# Altium PCB pin.PcbDoc
Units mm, origin at the board's own origin, x right, y up, seen from the top; angles counter-clockwise.
Board outline 29.93 x 30.18 mm, 2 copper layers (Top Layer, Bottom Layer); 18 components, 11 nets, 94 pads, 10 vias.
Unrouted connection lines stored in the file: 1.
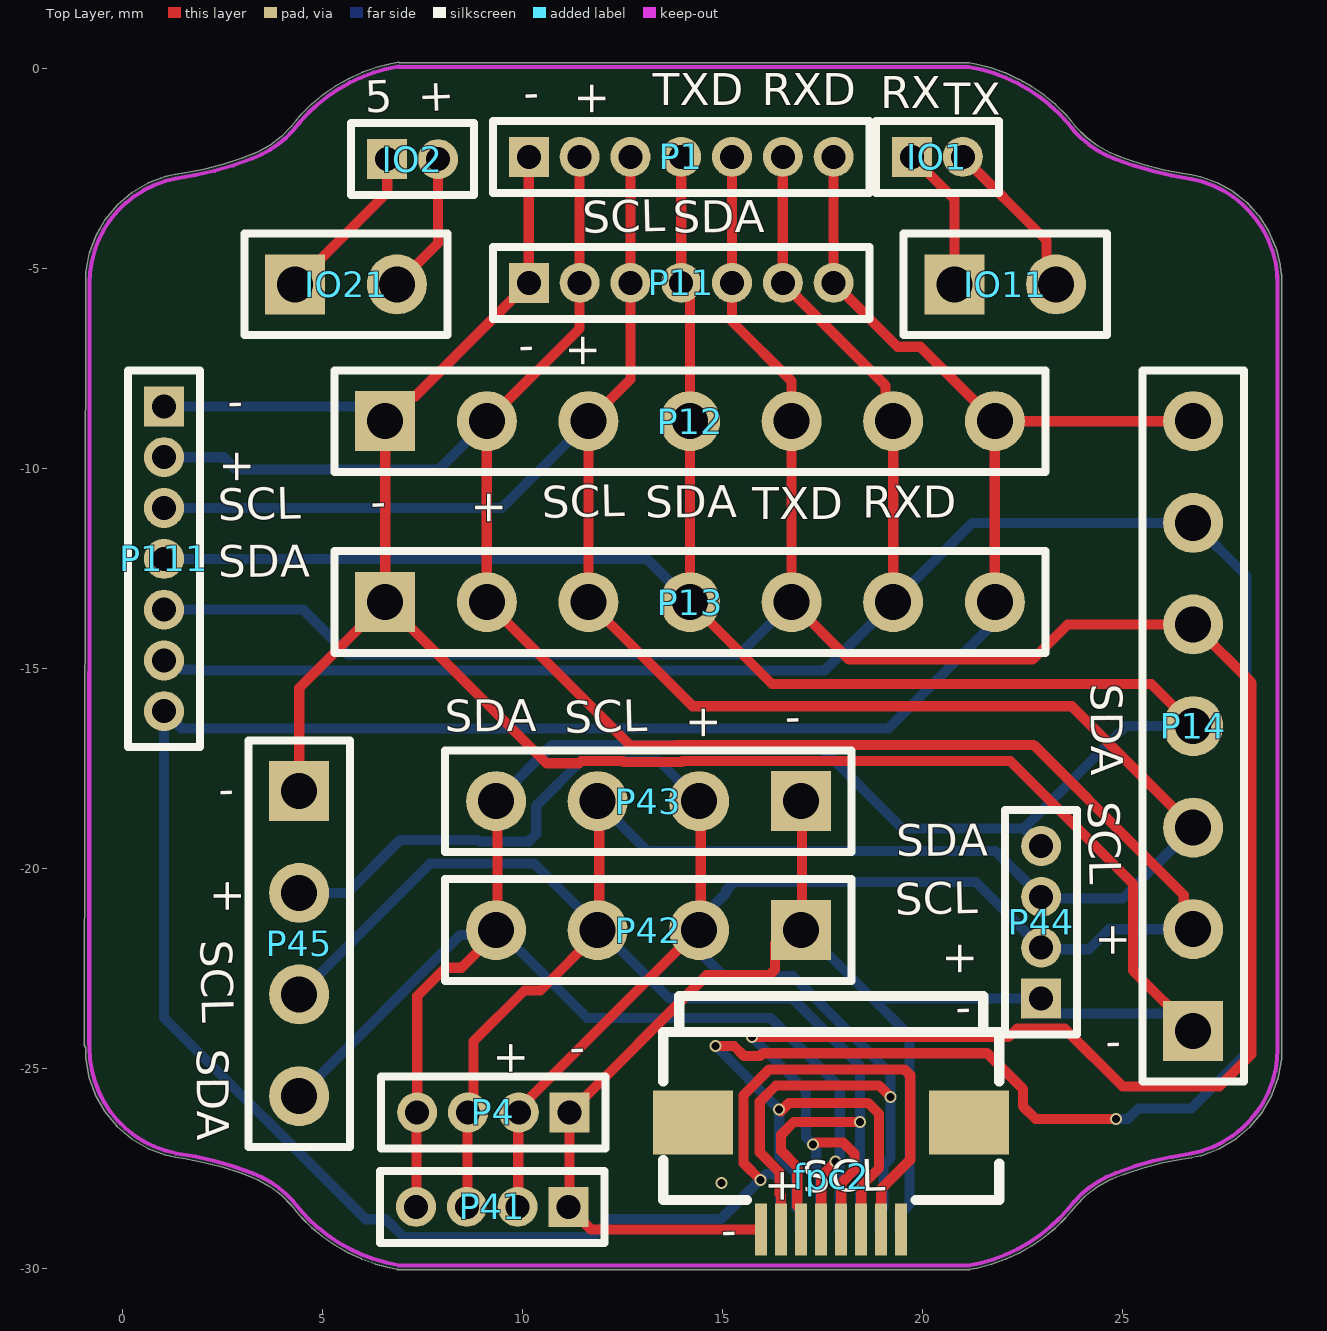
[diagram p0: Top Layer view]
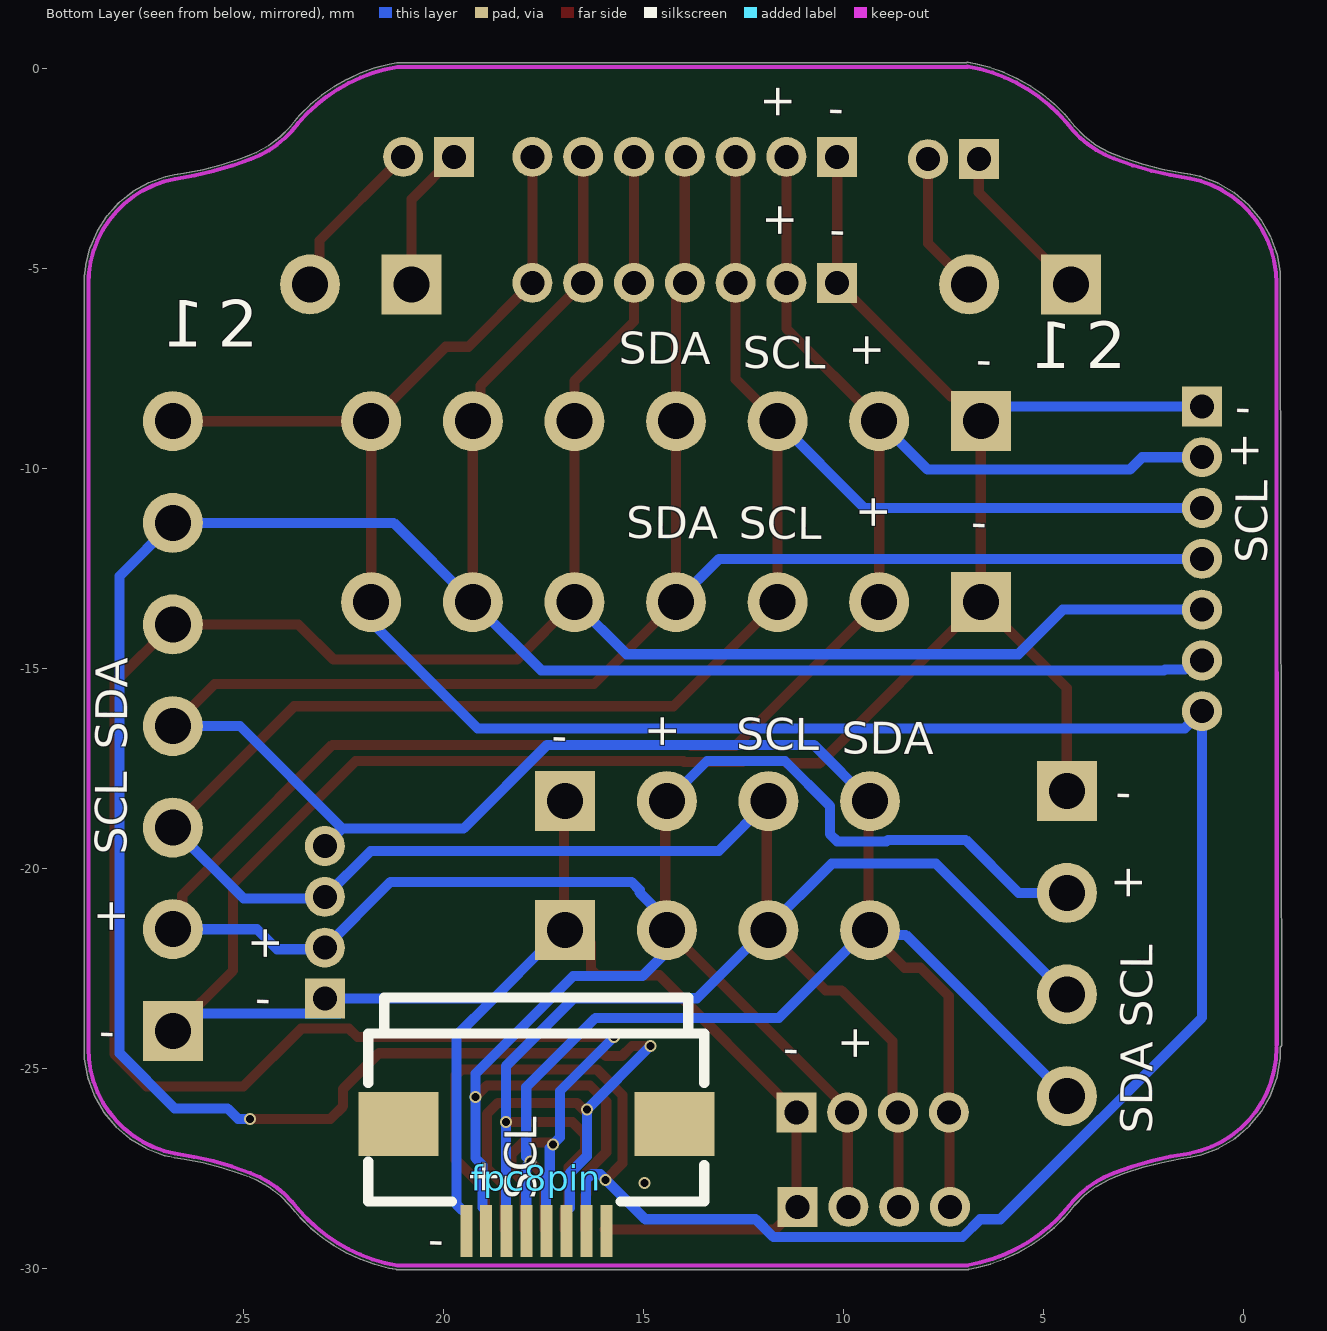
[diagram p1: Bottom Layer view, seen from below]

## Layer stack, top to bottom
Top Solder: solder mask 0.0102, Solder Resist, Dk 3.5
Top Layer: signal copper 0.0356
Dielectric 1: dielectric 0.32, FR-4, Dk 4.8
Bottom Layer: signal copper 0.0356
Bottom Solder: solder mask 0.0102, Solder Resist, Dk 3.5

## Board outline
344 vertices, not listed, extent -0.96,-30.021 28.969,0.16
cut-out: -0.882,-24.41 -0.882,-15.07 -0.879,-15.07 -0.879,-24.41

## Design rules (kind name [scope] priority, off if disabled: settings)
Clearance [All] p1: gap=0.127 ignorepadtopadclearanceinfootprint=FALSE except(0.15: Arc-Arc Arc-Track Track-Track; 0.2: Arc-Via Track-Via SMDPad-Via THPad-Via Via-Fill Via-Poly Via-Region; 0.4: Via-Via)
PolygonConnect [All] p1: connectstyle=Direct reliefconductorwidth=0.254 reliefentries=4 polygonreliefangle="90 Angle" airgapwidth=0.254
RoutingVias [All] p1: holewidth=0.4 width=1 viastyle="Through Hole" minholewidth=0.3 minwidth=0.6 maxholewidth=0.711 maxwidth=1.27
SolderMaskExpansion [All] p1: expansion=0.102 istentingtop=FALSE
Width [All] p1: maxlimit=3 minlimit=0.127 preferedwidth=0.254 minimp=50.000000 maximp=50.000000 favimp=50.000000
30 further rules are at their usual default settings.

## Components (designator, comment, footprint, x,y, rotation, side; value= is the part's Value field where it differs from the comment)
fpc2 "fpc8pin" fpcpin8 17.832,-26.622 r0 top
fpc8pin "fpc8pin" fpcpin8 17.55,-26.66 r180 bottom
IO1 "串口调试" MHDR1X2 19.73,-2.2 r0 top
IO2 "5v与3.3v相联" MHDR1X2 6.61,-2.26 r0 top
IO11 "Header 2" HDR1X2 20.79,-5.39 r0 top
IO21 "Header 2" HDR1X2 4.31,-5.39 r0 top
P1 "MHDR1X7" MHDR1X7 10.15,-2.2 r0 top
P4 "MHDR1X4" MHDR1X4 11.17,-26.09 r180 top
P11 "MHDR1X7" MHDR1X7 10.15,-5.35 r0 top
P12 "Header 7" HDR1X7 6.56,-8.81 r0 top
P13 "Header 7" HDR1X7 6.56,-13.33 r0 top
P14 "Header 7" HDR1X7 26.76,-24.05 r90 top
P41 "MHDR1X4" MHDR1X4 11.14,-28.45 r180 top
P42 "Header 4" HDR1X4 16.95,-21.53 r180 top
P43 "Header 4" HDR1X4 16.95,-18.31 r180 top
P44 "MHDR1X4" MHDR1X4 22.96,-23.24 r90 top
P45 "Header 4" HDR1X4 4.41,-18.06 r270 top
P111 "MHDR1X7" MHDR1X7 1.03,-8.44 r270 top

## Footprints (in the part's own frame and the unit in brackets; to place one, negate y for a bottom-side part, rotate by r counter-clockwise, add the part's x,y. Pads: shape width x height; smd on the part's side, far side on the other; paste and mask are expansions set on the pad)
fpcpin8 [mm]
  rect 0.3x1.3 smd paste+0 mask+0.05: 1(-1.872,-2.398) 2(-1.374,-2.396) 3(-0.872,-2.398) 4(-0.372,-2.398) 5(0.128,-2.398) 6(0.628,-2.398) 7(1.128,-2.398) 8(1.628,-2.398)
  rect 2x1.6 smd: 9(3.328,0.282) 10(-3.572,0.282)
  silkscreen extent -4.32,-1.66 4.08,3.44
HDR1X2 [mm] "Connector; Header; 2 Position"
  rect 1.5x1.5 hole 0.9: 1(0,0)
  round 1.5 hole 0.9: 2(2.54,0)
  silkscreen extent -1.27,-1.27 3.81,1.27
HDR1X4 [mm] "Connector; Header; 4 Position"
  rect 1.5x1.5 hole 0.9: 1(0,0)
  round 1.5 hole 0.9: 2(2.54,0) 3(5.08,0) 4(7.62,0)
  silkscreen extent -1.27,-1.27 8.89,1.27
HDR1X7 [mm] "Connector; Header; 7 Position"
  rect 1.5x1.5 hole 0.9: 1(0,0)
  round 1.5 hole 0.9: 2(2.54,0) 3(5.08,0) 4(7.62,0) 5(10.16,0) 6(12.7,0) 7(15.24,0)
  silkscreen extent -1.27,-1.27 16.51,1.27
MHDR1X2 [mm] "Connector; Header; 2 Position"
  rect 1x1 hole 0.6: 1(0,0)
  round 1 hole 0.6: 2(1.27,0)
  silkscreen extent -0.9,-0.9 2.17,0.9
MHDR1X4 [mm] "Connector; Header; 4 Position"
  rect 1x1 hole 0.6: 1(0,0)
  round 1 hole 0.6: 2(1.27,0) 3(2.54,0) 4(3.81,0)
  silkscreen extent -0.9,-0.9 4.71,0.9
MHDR1X7 [mm] "Connector; Header; 7 Position"
  rect 1x1 hole 0.6: 1(0,0)
  round 1 hole 0.6: 2(1.27,0) 3(2.54,0) 4(3.81,0) 5(5.08,0) 6(6.35,0) 7(7.62,0)
  silkscreen extent -0.9,-0.9 8.52,0.9

## Part data
IO1 IO2: library part "Header 2", "Header, 2-Pin", LatestRevisionDate=17-Jul-2002, LatestRevisionNote="Re-released for DXP Platform.", Publisher="Altium Limited"
IO11 IO21: "Header, 2-Pin", LatestRevisionDate=17-Jul-2002, LatestRevisionNote="Re-released for DXP Platform.", Publisher="Altium Limited"
P1 P11 P12 P13 P14 P111: "Header, 7-Pin", LatestRevisionDate=17-Jul-2002, LatestRevisionNote="Re-released for DXP Platform.", Publisher="Altium Limited"
P4 P41 P42 P43 P44 P45: "Header, 4-Pin", LatestRevisionDate=17-Jul-2002, LatestRevisionNote="Re-released for DXP Platform.", Publisher="Altium Limited"

## Via types
v1: diameter 0.3, hole 0.2, Top Layer to Bottom Layer, 10 vias

## Nets (pads, with @x,y where several pads share a name; then routed paths per layer and width w, separated by ;. In a path a pad name is that pad's centre, name@x,y a point inside that pad or via, vN(x,y) a via of type N, cw(c..) or ccw(c..) an arc to the next point about the centre after c; other vN are vias at no path point)
+3.3V: fpc2.2 fpc8pin.2 P1.2 P4.2 P11.2 P12.2 P13.2 P14.2 P41.2 P42.2 P43.2 P44.2 P45.2 P111.2 | length 98.1
  Top Layer w0.254: P41.2 9.885,-28.435 9.885,-26.105 P4.2 9.9,-25.905 9.996,-25.905 14.371,-21.53 14.49,-21.53 14.45,-21.49 14.45,-18.35 P43.2 ; P1.2 P11.2 11.42,-6.49 P12.2 P13.2 12.691,-16.921 13.808,-16.921 13.827,-16.902 22.771,-16.902 25.487,-19.618 26.524,-20.655 26.524,-21.274 P14.2 ; fpc2.2 16.458,-28.173 16.417,-28.132 16.417,-27.582 15.924,-27.089 15.924,-25.822 16.329,-25.416 18.908,-25.416 v1(19.193,-25.701)
  Bottom Layer w0.254: P111.2 2.525,-9.71 2.835,-10.02 7.89,-10.02 P12.2 ; P45.2 5.616,-20.6 6.94,-19.276 8.876,-19.276 8.914,-19.314 10.147,-19.314 10.334,-19.127 10.334,-18.426 11.454,-17.306 13.406,-17.306 P43.2 ; fpc8pin.2 18.924,-28.556 19.018,-28.462 19.018,-28.385 19.018,-27.408 19.193,-27.233 19.193,-25.722 v1@19.214,-25.701 ; v1(19.193,-25.701) 19.193,-25.122 16.754,-22.682 15.023,-22.682 14.675,-22.334 14.526,-22.185 14.526,-21.566 14.49,-21.53 14.49,-21.193 15.088,-20.595 15.088,-20.532 15.294,-20.326 21.316,-20.326 23,-22.01 24.154,-22.01 24.654,-21.51 P14.2
ESP_RXD: fpc2.6 fpc8pin.6 P1.6 P11.6 P12.6 P13.6 P14.6 P111.6 | length 79.7
  Top Layer w0.254: v1(14.82,-24.43) 15.281,-24.43 15.532,-24.681 15.928,-24.681 16.001,-24.608 21.607,-24.608 22.501,-25.502 22.501,-25.932 22.819,-26.25 v1(24.83,-26.25) ; v1@16.45,-26.06 16.66,-25.85 18.629,-25.85 18.909,-26.13 18.909,-27.48 18.46,-27.929 fpc2.6 ; P1.6 P11.6 19.064,-7.914 19.064,-8.614 P12.6 P13.6
  Bottom Layer w0.254: P111.6 1.232,-14.79 1.459,-15.017 1.956,-15.017 1.978,-15.039 17.551,-15.039 P13.6 21.24,-11.35 P14.6 28.09,-12.68 28.09,-24.61 26.71,-25.99 25.39,-25.99 25.13,-26.25 v1(24.83,-26.25) ; v1(14.82,-24.43) v1(16.408,-26.02) 16.409,-27.186 16.836,-27.613 16.836,-28.472 16.922,-28.558 fpc8pin.6
ESP_TXD: fpc2.5 fpc8pin.5 P1.5 P11.5 P12.5 P13.5 P14.5 P111.5 | length 73.1
  Top Layer w0.254: P1.5 P11.5 15.23,-6.317 16.72,-7.807 P12.5 P13.5 18.16,-14.77 22.74,-14.77 23.62,-13.89 P14.5 28.22,-15.35 28.22,-24.63 27.41,-25.44 24.995,-25.44 23.549,-23.994 22.355,-23.994 22.144,-24.204 v1(15.73,-24.204) ; v1(17.26,-26.892) 17.272,-26.892 17.32,-26.844 18.011,-26.844 18.29,-27.124 18.29,-27.527 17.96,-27.858 fpc2.5
  Bottom Layer w0.254: P111.5 4.51,-13.52 5.625,-14.635 15.415,-14.635 P13.5 ; v1(15.73,-24.204) 17.08,-25.554 17.08,-26.712 v1(17.26,-26.892) ; v1@17.281,-26.892 17.269,-26.905 17.269,-26.914 17.336,-26.981 17.336,-27.63 17.432,-27.726 17.432,-29.048 fpc8pin.5
GND: fpc2.1 fpc8pin.1 P1.1 P4.1 P11.1 P12.1 P13.1 P14.1 P41.1 P42.1 P43.1 P44.1 P45.1 P111.1 | length 87
  Top Layer w0.254: P45.1 4.41,-15.48 P13.1 ; P1.1@10.23,-2.28 P1.1 P11.1 7.313,-8.187 7.183,-8.187 P12.1 P13.1 ; fpc2.1 11.71,-29.02 P41.1 11.17,-28.42 P4.1 14.6,-22.66 16.158,-22.66 16.307,-22.511 16.307,-21.853 16.707,-21.853 17.03,-21.53 16.98,-21.48 16.98,-18.34 P43.1 ; P14.1 25.256,-22.546 25.256,-20.375 22.186,-17.306 13.994,-17.306 13.975,-17.325 12.524,-17.325 12.505,-17.306 11.454,-17.306 11.4,-17.36 10.59,-17.36 P13.1
  Bottom Layer w0.254: P111.1 6.19,-8.44 P12.1 ; P42.1@17.03,-21.53 17.453,-21.953 18.74,-23.24 ; fpc8pin.1 19.422,-28.558 19.445,-28.535 19.521,-28.535 19.67,-28.386 19.67,-24.17 18.74,-23.24 ; P44.1@22.582,-23.618 26.328,-23.618 P14.1 ; 18.74,-23.24 P44.1@22.65,-23.24 ; P44.1@22.65,-23.24 P44.1 22.96,-23.55 P44.1@22.65,-23.24
NetIO1_1: IO1.1 IO11.1 | length 3.7
  Top Layer w0.254: IO1.1 20.79,-3.26 IO11.1
  Bottom Layer w0.254: IO1.1@19.357,-2.583 IO1.1@19.357,-2.573 ; IO1.1 19.79,-2.14 IO1.1@19.8,-2.14
NetIO1_2: IO1.2 IO11.2 | length 4.3
  Top Layer w0.254: IO1.2 23.092,-4.292 23.092,-5.152 IO11.2
  Bottom Layer w0.254: IO1.2@20.942,-2.262 20.942,-2.229 IO1.2
NetIO2_1: IO2.1 IO21.1 | length 4.1
  Top Layer w0.254: IO21.1 6.61,-3.09 IO2.1
NetIO2_2: IO2.2 IO21.2 | length 3.6
  Top Layer w0.254: IO21.2 7.88,-4.36 IO2.2
PO: fpc2.7 fpc8pin.7 P1.7 P11.7 P12.7 P13.7 P14.7 P111.7 | length 80.1
  Top Layer w0.254: v1(15.94,-27.78) 15.52,-27.36 15.52,-25.654 16.162,-25.012 19.536,-25.012 19.685,-25.161 19.685,-27.275 18.96,-28 fpc2.7 ; P1.7 P11.7 19.368,-6.948 19.938,-6.948 P12.7 ; P13.7 P12.7 ; P14.7 P12.7
  Bottom Layer w0.254: fpc8pin.7 16.432,-29.048 16.432,-27.781 16.283,-27.632 16.073,-27.632 14.945,-28.76 12.189,-28.76 11.745,-29.204 7.018,-29.204 6.574,-28.76 6.07,-28.76 1.03,-23.72 P111.7 1.459,-16.489 19.141,-16.489 21.88,-13.75 P13.7@21.88,-12.73 ; P12.7@21.23,-8.81 P12.7
SCL: fpc2.3 fpc8pin.3 P1.3 P4.3 P11.3 P12.3 P13.3 P14.3 P41.3 P42.3 P43.3 P44.3 P45.3 P111.3 | length 95.2
  Top Layer w0.254: P41.3 8.615,-28.435 8.615,-26.105 P4.3 8.768,-25.952 8.768,-24.312 10.04,-23.04 10.44,-23.04 11.95,-21.53 11.91,-21.49 11.91,-18.35 P43.3 ; P1.3 P11.3 12.69,-7.76 P12.3 P13.3 14.244,-15.934 23.724,-15.934 P14.3 ; fpc2.3 16.96,-28.52 16.862,-28.422 16.862,-27.456 16.457,-27.051 16.457,-26.646 16.775,-26.327 v1(18.432,-26.327)
  Bottom Layer w0.254: P111.3 9.47,-10.98 P12.3 ; P45.3@4.53,-23.15 4.53,-23.02 7.68,-19.87 10.29,-19.87 11.95,-21.53 13.654,-23.234 16.734,-23.234 18.432,-24.932 18.432,-29.048 fpc8pin.3 ; P43.3 13.113,-19.553 21.813,-19.553 P44.3 23,-20.74 24.99,-20.74 P14.3
SDA: fpc2.4 fpc8pin.4 P1.4 P4.4 P11.4 P12.4 P13.4 P14.4 P41.4 P42.4 P43.4 P44.4 P45.4 P111.4 | length 92.9
  Top Layer w0.254: P41.4 7.345,-28.435 7.345,-26.105 P4.4 7.36,-23.18 8.066,-22.474 8.466,-22.474 9.41,-21.53 9.37,-21.49 9.37,-18.35 P43.4 ; P1.4 P11.4 13.96,-5.552 14.18,-5.772 P12.4 P13.4 ; P13.4@14.191,-13.341 16.23,-15.38 25.71,-15.38 P14.4 ; fpc2.4 17.46,-27.687 17.813,-27.334 v1(17.813,-27.321)
  Bottom Layer w0.254: P111.4 13.1,-12.25 P13.4 ; P45.4@4.53,-25.69 4.53,-25.56 8.439,-21.651 9.289,-21.651 9.41,-21.53 11.607,-23.727 16.195,-23.727 17.922,-25.455 17.922,-27.198 17.822,-27.298 17.822,-27.313 v1(17.813,-27.321) ; P43.4 10.738,-16.902 17.401,-16.902 19.489,-18.99 22.52,-18.99 ; v1@17.806,-27.314 17.806,-27.327 17.922,-27.443 fpc8pin.4 ; P44.4 22.52,-18.99 ; P14.4 25.08,-16.43 22.52,-18.99
pads on no net: fpc2.8 fpc2.9 fpc2.10 fpc8pin.8 fpc8pin.9 fpc8pin.10
copper on no net:
  other v1: 14.97,-27.85

## Keep-outs
Keep-Out Layer:
  lines w0.1: -0.832,-24.41 -0.832,-5.331 ; -0.832,-5.371 cw(c1.828,-5.353) 1.331,-2.74 ccw(c0.163,5.633) 3.226,-2.247 ccw(c2.316,0.185) 4.411,-1.349 cw(c7.582,-4.047) 6.895,0.06 ; -0.828,-24.48 ccw(c1.832,-24.498) 1.334,-27.112 cw(c0.166,-35.484) 3.23,-27.605 cw(c2.319,-30.037) 4.414,-28.503 ccw(c7.585,-25.804) 6.898,-29.911 ; 6.895,0.05 21.142,0.05 cw(c20.455,-4.057) 23.626,-1.359 ccw(c25.721,0.175) 24.81,-2.257 ccw(c27.874,5.623) 26.706,-2.75 cw(c26.208,-5.363) 28.868,-5.381 ; 6.898,-29.921 21.142,-29.921 ; 21.142,-29.917 ccw(c20.455,-25.811) 23.626,-28.509 ; 23.629,-28.508 cw(c25.724,-30.042) 24.813,-27.61 cw(c27.876,-35.489) 26.708,-27.117 ; 26.706,-27.118 ccw(c26.208,-24.505) 28.868,-24.487 28.868,-5.161

## Silkscreen, mask and mechanical layers (free items; w line width, h text height)
Top Overlay:
  text "+" at 12.073,-0.28 h0.8 r90
  text "TXD" at 13.25,-0.91 h0.8
  text "RXD" at 15.97,-0.91 h0.8
  text "RX" at 18.94,-0.98 h0.8
  text "-" at 10.427,-0.984 h0.8 r1.64
  text "+" at 8.31,-1.04 h0.8 r2.07
  text "5" at 6.06,-1.1 h0.8 r2.07
  text "TX" at 20.52,-1.15 h0.8
  text "SDA" at 13.749,-4.099 h0.8 r0.32
  text "SCL" at 11.496,-4.116 h0.8 r1.45
  text "+" at 11.843,-6.59 h0.8 r90
  text "-" at 10.297,-7.294 h0.8 r1.64
  text "-" at 3.027,-8.704 h0.8 r1.64
  text "+" at 3.193,-9.48 h0.8 r90
  text "+" at 9.503,-10.51 h0.8 r90
  text "-" at 6.597,-11.214 h0.8 r1.64
  text "SCL" at 10.486,-11.236 h0.8 r1.45
  text "SDA" at 13.059,-11.219 h0.8 r0.32
  text "RXD" at 18.49,-11.22 h0.8
  text "TXD" at 15.73,-11.26 h0.8
  text "SCL" at 2.386,-11.296 h0.8 r1.45
  text "SDA" at 2.389,-12.709 h0.8 r0.32
  text "SDA" at 24.201,-15.369 h0.8 r270.32
  text "+" at 14.863,-15.89 h0.8 r90
  text "SDA" at 8.049,-16.569 h0.8 r0.32
  text "-" at 16.957,-16.584 h0.8 r1.64
  text "SCL" at 11.046,-16.616 h0.8 r1.45
  text "SCL" at 24.124,-18.326 h0.8 r271.45
  text "-" at 2.797,-18.404 h0.8 r1.64
  text "SDA" at 19.339,-19.689 h0.8 r0.32
  text "+" at 2.963,-20.22 h0.8 r90
  text "SCL" at 19.316,-21.166 h0.8 r1.45
  text "+" at 25.103,-21.32 h0.8 r90
  text "SCL" at 1.934,-21.786 h0.8 r271.45
  text "+" at 21.275,-21.789 h0.8 r90
  text "-" at 21.217,-23.844 h0.8 r1.64
  text "+" at 10.043,-24.27 h0.8 r90
  text "SDA" at 1.851,-24.499 h0.8 r270.32
  text "-" at 24.977,-24.704 h0.8 r1.64
  text "-" at 11.577,-24.854 h0.8 r1.64
  text "+" at 16.841,-27.479 h0.8 r90
  text "SCL" at 17.004,-28.093 h0.8 r1.45
  text "-" at 15.357,-29.424 h0.8 r1.64
Bottom Overlay:
  text "+" at 11.975,-1.282 h0.8 r90
  text "-" at 10.38,-1.368 h0.8 r1.64
  text "+" at 11.925,-4.242 h0.8 r90
  text "-" at 10.35,-4.408 h0.8 r1.64
  text "1" at 25.97,-7.33 h2
  text "2" at 25.631,-7.337 h2
  text "SDA" at 15.609,-7.371 h0.8 r0.32
  text "+" at 9.745,-7.502 h0.8 r90
  text "SCL" at 12.514,-7.488 h0.8 r0.32
  text "-" at 6.68,-7.658 h0.8 r1.64
  text "2" at 3.931,-7.877 h2
  text "1" at 4.27,-7.87 h2
  text "-" at 0.206,-8.844 h0.8 r1.64
  text "+" at 0.294,-10.009 h0.8 r90
  text "+" at 9.585,-11.552 h0.8 r90
  text "-" at 6.81,-11.718 h0.8 r1.64
  text "SCL" at 12.614,-11.748 h0.8 r0.32
  text "SDA" at 15.426,-11.738 h0.8 r0.32
  text "SCL" at -0.606,-12.363 h0.8 r270.32
  text "SCL" at 12.674,-17.028 h0.8 r0.32
  text "+" at 14.866,-17.021 h0.8 r90
  text "SDA" at 27.904,-17.028 h0.8 r270.32
  text "-" at 17.298,-17.055 h0.8 r1.64
  text "SDA" at 10.039,-17.125 h0.8 r0.32
  text "-" at 3.197,-18.474 h0.8 r1.64
  text "SCL" at 27.906,-19.65 h0.8 r270.32
  text "+" at 3.209,-20.809 h0.8 r90
  text "+" at 28.639,-21.643 h0.8 r90
  text "+" at 24.785,-22.321 h0.8 r90
  text "-" at 24.713,-23.622 h0.8 r1.64
  text "SCL" at 2.279,-23.969 h0.8 r270.32
  text "-" at 28.616,-24.449 h0.8 r1.64
  text "+" at 10.033,-24.82 h0.8 r90
  text "-" at 11.507,-24.874 h0.8 r1.64
  text "SDA" at 2.279,-26.629 h0.8 r270.32
  text "+" at 19.32,-28.164 h0.8 r90
  text "SCL" at 17.679,-28.272 h0.8 r270.32
  text "-" at 20.389,-29.663 h0.8 r1.64
Mechanical 1:
  drawing of 187 lines, arcs and shapes, not listed